# Altium PCB AMS_Slave.PcbDoc (part 1 of 2)
Units mm, origin at the board's own origin, x right, y up, seen from the top; angles counter-clockwise.
Board outline 75.06 x 58.17 mm, 2 copper layers (Top Layer, Bottom Layer); 190 components, 132 nets, 535 pads, 278 vias.
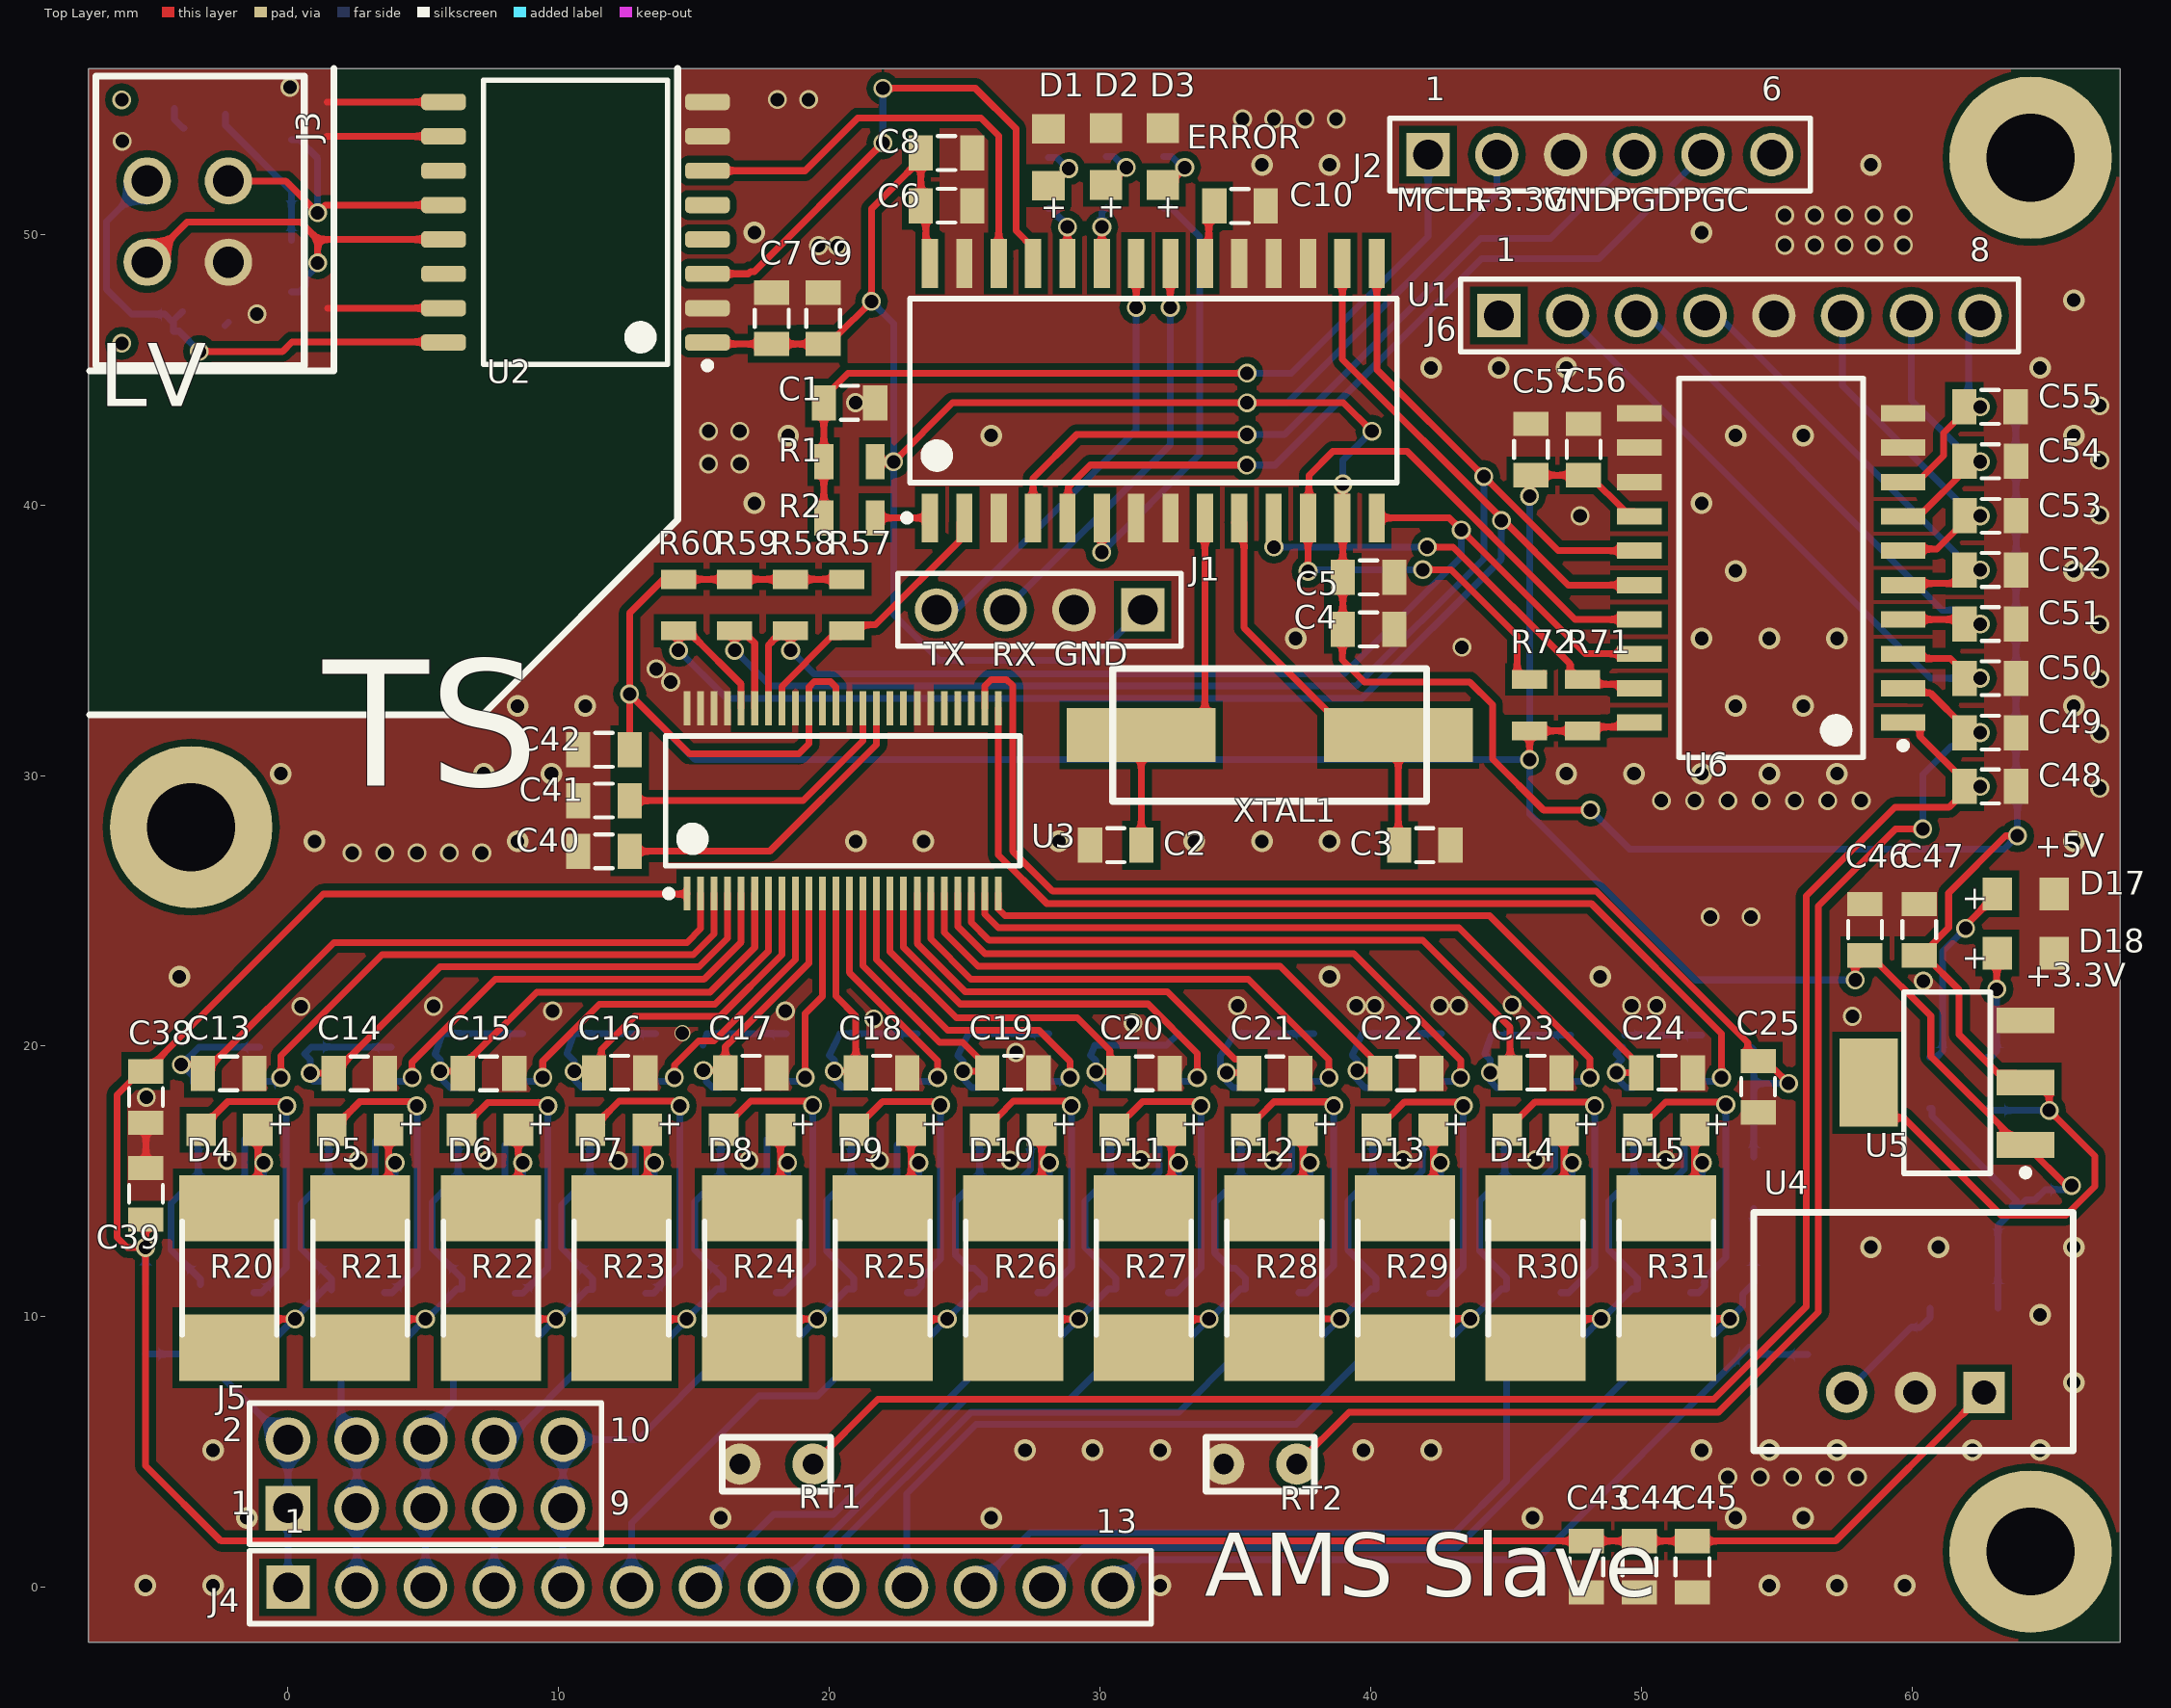
[diagram p0: Top Layer view]
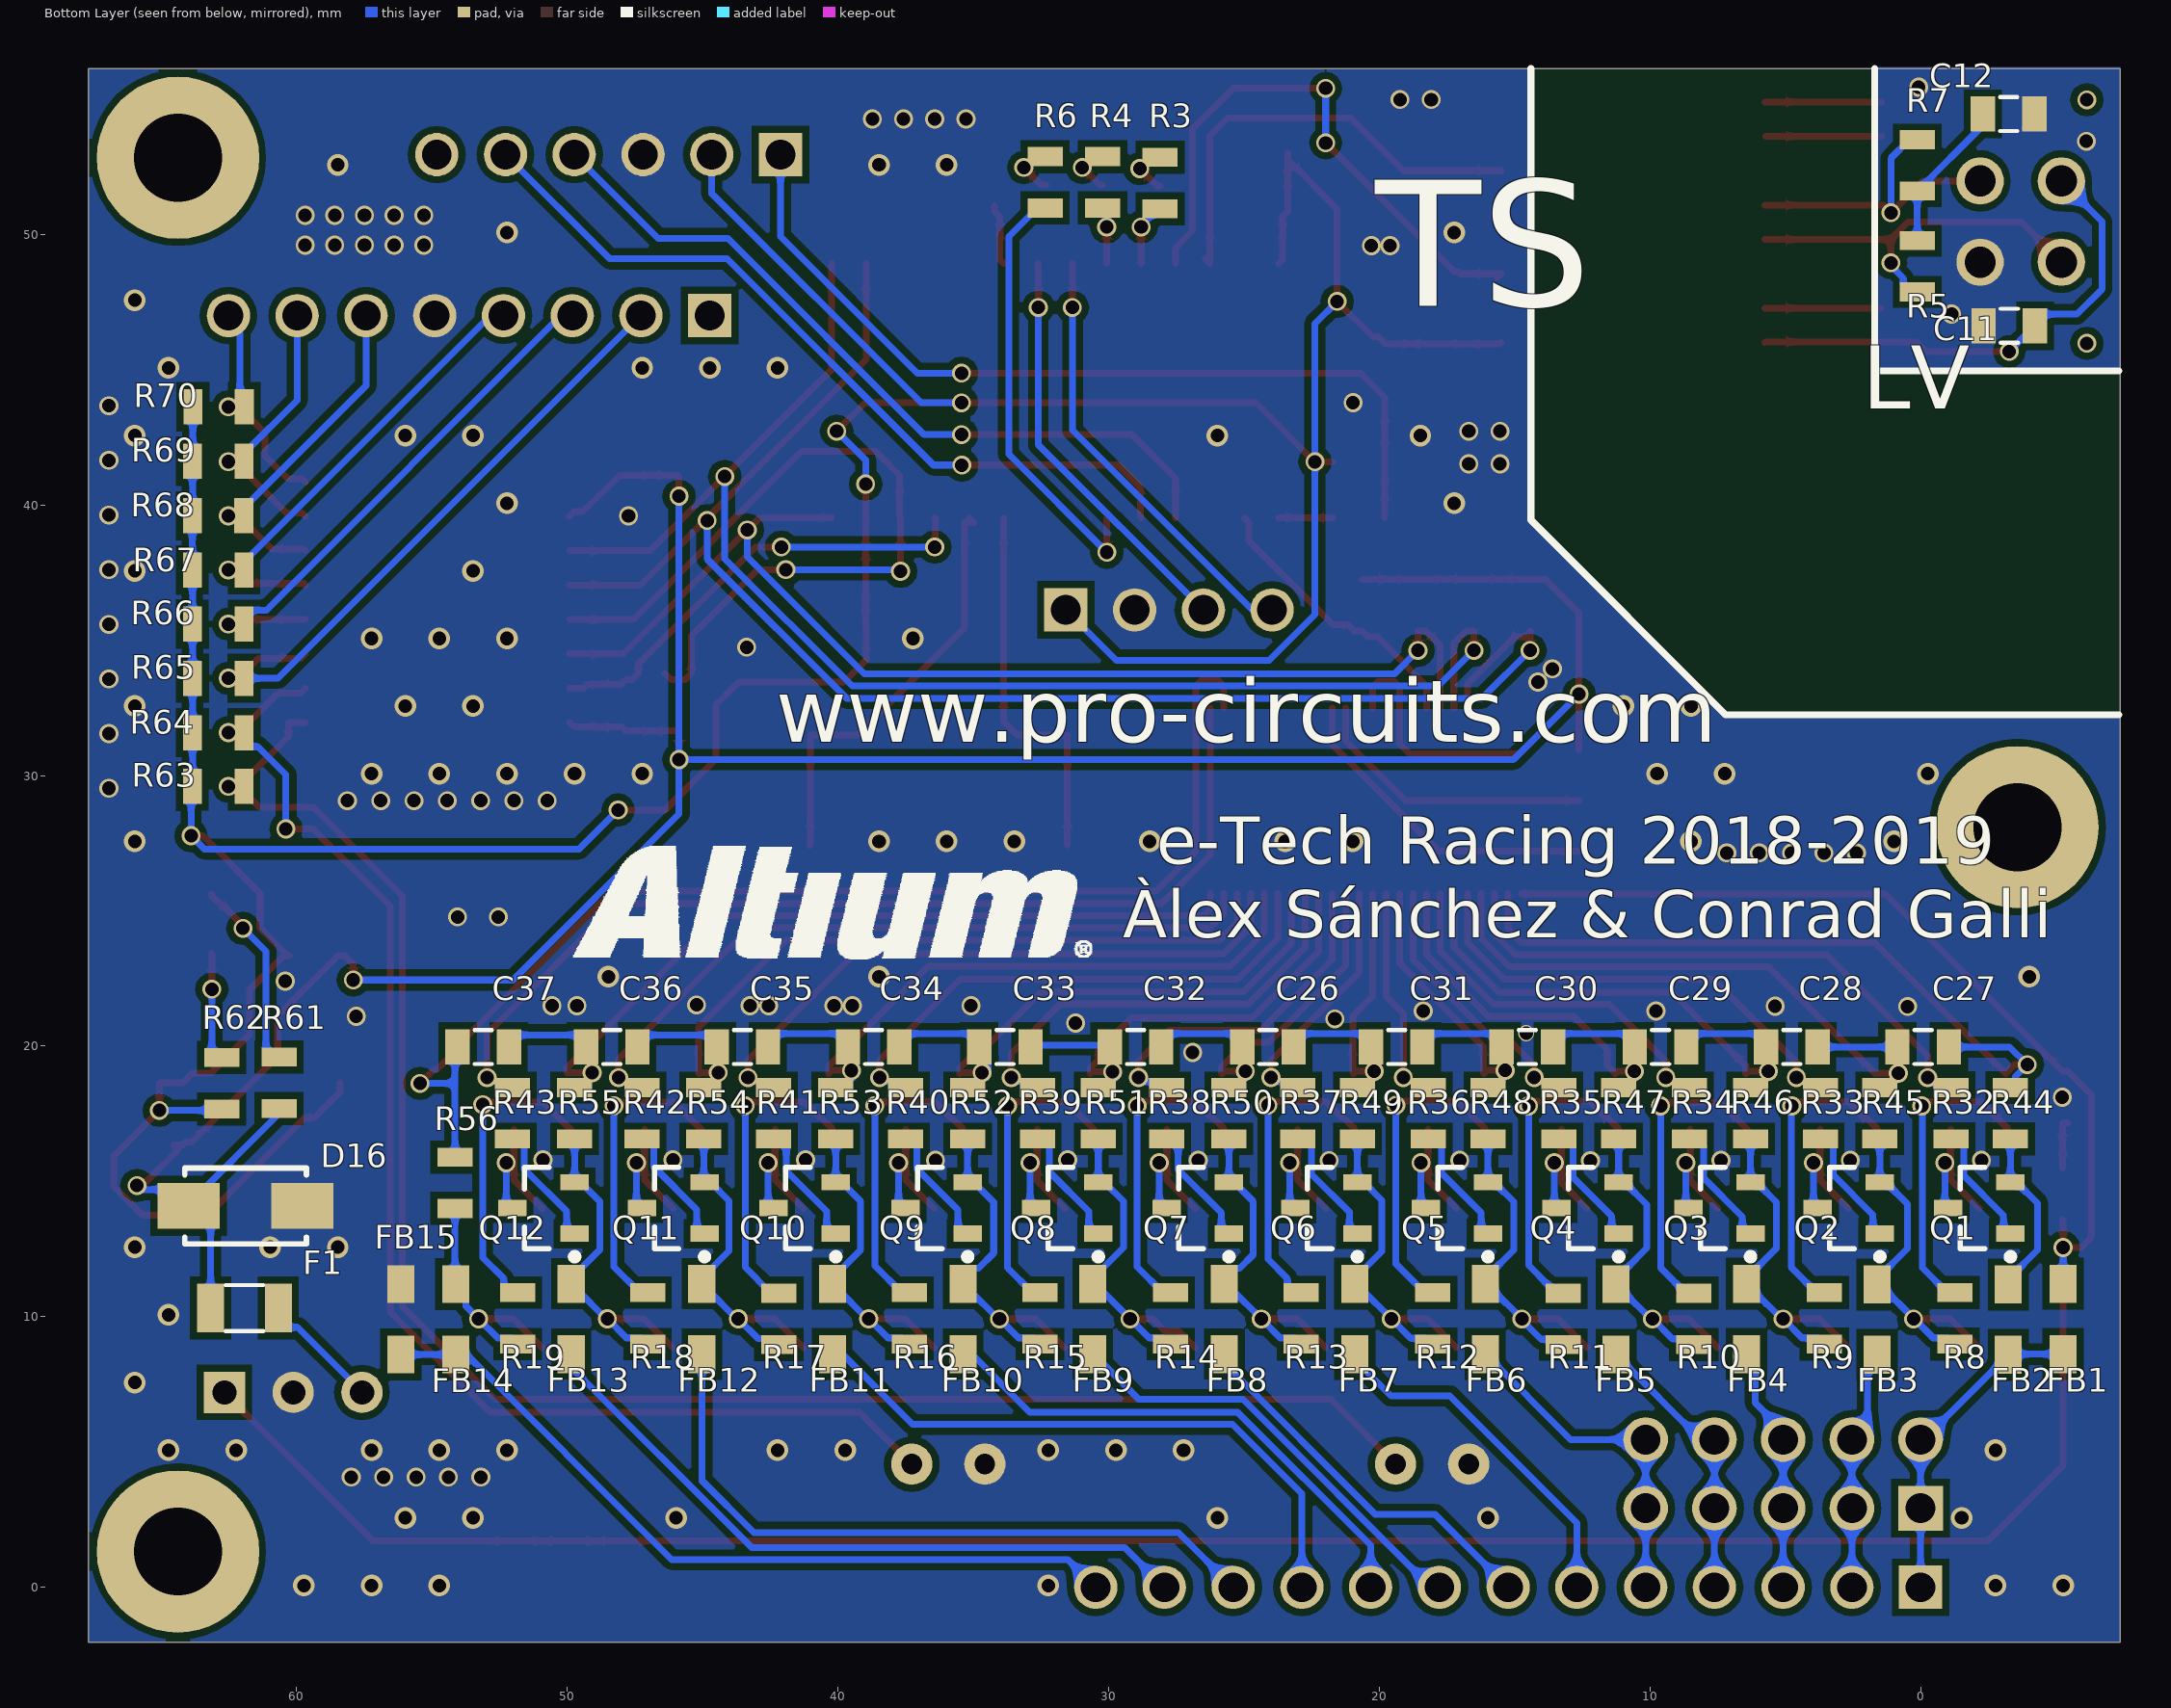
[diagram p1: Bottom Layer view, seen from below]
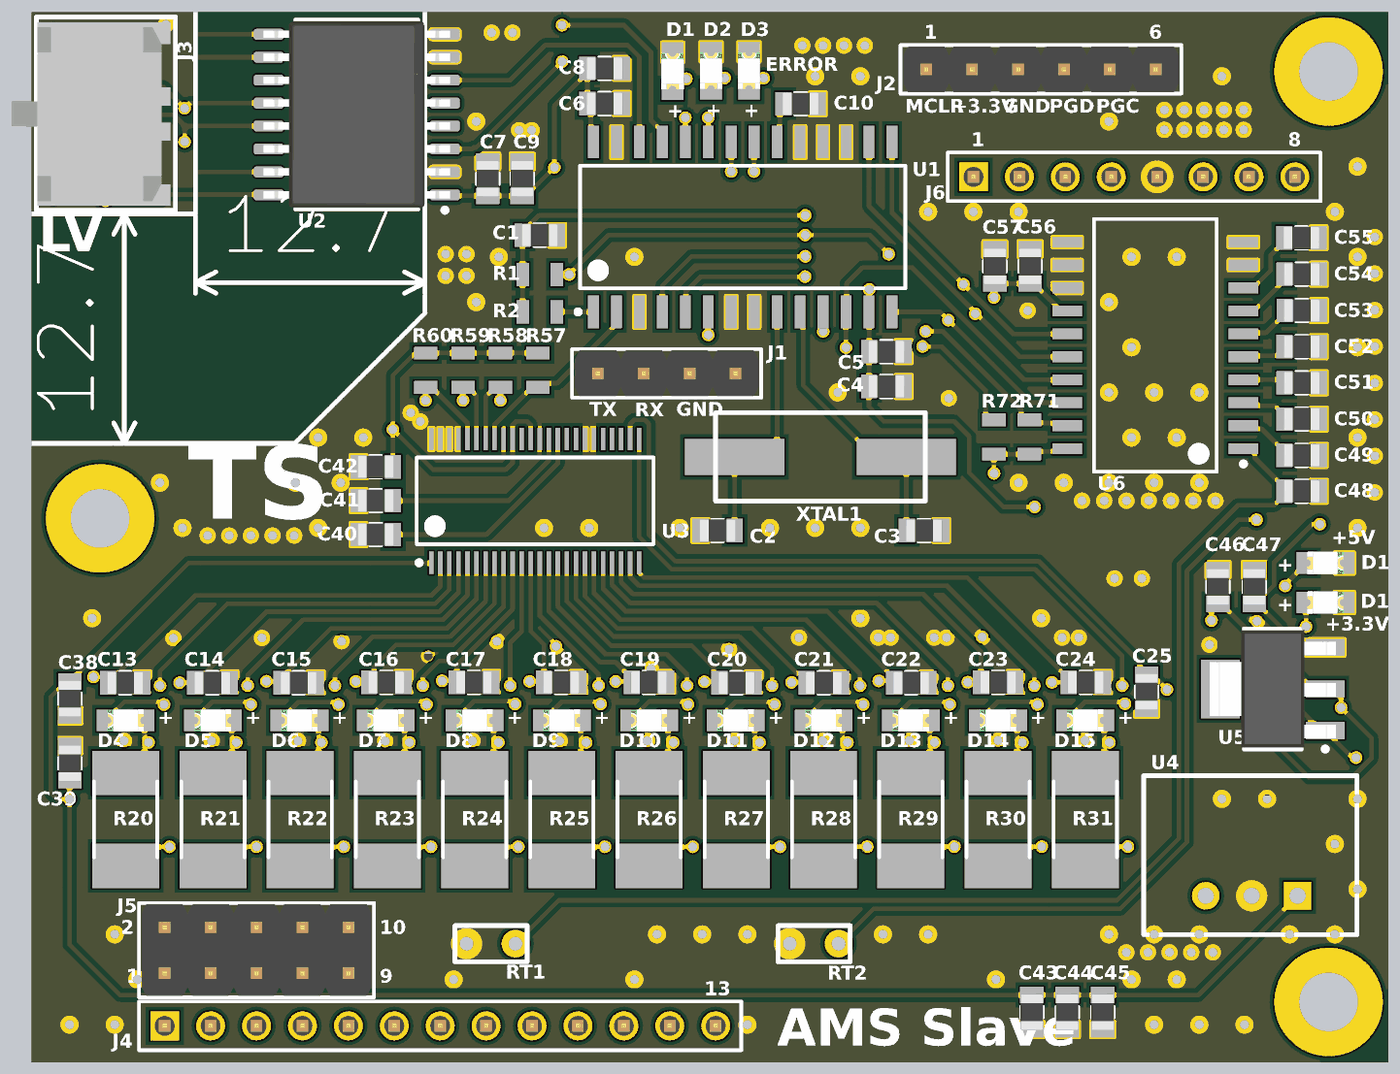
[diagram p3: 3D render of the assembled board from above, using the file's embedded part models]

## Layer stack, top to bottom
Top Solder: solder mask 0.0102, Solder Resist, Dk 3.5
Top Layer: signal copper 0.0356
Dielectric 1: dielectric 0.32, FR-4, Dk 4.8
Bottom Layer: signal copper 0.0356
Bottom Solder: solder mask 0.0102, Solder Resist, Dk 3.5

## Board outline
-7.366,-2.032 -7.366,56.134 67.691,56.134 67.691,-2.032

## Design rules (kind name [scope] priority, off if disabled: settings)
Clearance [All] p1: gap=0.254 ignorepadtopadclearanceinfootprint=TRUE except(0: Arc-Hole Track-Hole SMDPad-Hole THPad-Hole Via-Hole Fill-Hole Poly-Hole Region-Hole Text-Hole; 0.15: Arc-Via Track-Via SMDPad-Via; 0.2: Arc-Arc Arc-Track Arc-SMDPad Track-Track Track-SMDPad)
PolygonConnect [All] p1: connectstyle=Direct reliefconductorwidth=0.254 reliefentries=4 polygonreliefangle="90 Angle" airgapwidth=0.254
RoomDefinition AMS_MCU [InComponentClass('AMS_MCU')] p1: confinementstyle=ConfineIn formatcopy=TRUE lockcomponents=FALSE outline -9,26.35 69.35,26.35 69.35,57.425 -9,57.425
RoomDefinition AMS_balancing [InComponentClass('AMS_balancing')] p2: confinementstyle=ConfineIn formatcopy=TRUE lockcomponents=FALSE outline -7.95,-2.35 57.109,-2.35 57.109,41.574 -7.95,41.574
RoomDefinition AMS_temperature [InComponentClass('AMS_temperature')] p3: confinementstyle=ConfineIn formatcopy=TRUE lockcomponents=FALSE outline 15.593,3.05 68.6,3.05 68.6,51.775 15.593,51.775
RoomDefinition AMS_supply [InComponentClass('AMS_supply')] p4: confinementstyle=ConfineIn formatcopy=TRUE lockcomponents=FALSE outline 46.799,-2.837 68.15,-2.837 68.15,28.037 46.799,28.037
RoutingVias [All] p1: holewidth=0.2 width=0.5 viastyle="Through Hole" minholewidth=0.2 minwidth=0.5 maxholewidth=0.6 maxwidth=1.2
SolderMaskExpansion [All] p1: expansion=0.102
UnRoutedNet [All] p1: checkbadconnections=TRUE
Width [All] p1: maxlimit=0.254 minlimit=0.1 preferedwidth=0.25 minimp=50.000000 maximp=50.000000 favimp=50.000000
29 further rules are at their usual default settings.

## Classes and differential pairs
component class AMS_temperature: C48 C49 C50 C51 C52 C53 C54 C55 C56 C57 J6 R63 R64 R65 R66 R67 R68 R69 R70 R71 R72 RT1 RT2 U6
component class AMS_supply: C43 C44 C45 C46 C47 D16 D17 D18 F1 R61 R62 U4 U5
component class AMS_MCU: C1 C2 C3 C4 C5 C6 C7 C8 C9 C10 C11 C12 D1 D2 D3 J1 J2 J3 R1 R2 R3 R4 R5 R6 R7 U1 U2 XTAL1
component class AMS_balancing: C13 C14 C15 C16 C17 C18 C19 C20 C21 C22 C23 C24 C25 C26 C27 C28 C29 C30 C31 C32 C33 C34 C35 C36 C37 C38 C39 C40 C41 C42 D4 D5 D6 D7 D8 D9 D10 D11 D12 D13 D14 D15 FB1 FB2 FB3 FB4 FB5 FB6 FB7 FB8 FB9 FB10 FB11 FB12 FB13 FB14 FB15 J4 J5 Q1 Q2 Q3 Q4 Q5 Q6 Q7 Q8 Q9 Q10 Q11 Q12 R8 R9 R10 R11 R12 R13 R14 R15 R16 R17 R18 R19 R20 R21 R22 R23 R24 R25 R26 R27 R28 R29 R30 R31 R32 R33 R34 R35 R36 R37 R38 R39 R40 R41 R42 R43 R44 R45 R46 R47 R48 R49 R50 R51 R52 R53 R54 R55 R56 R57 R58 R59 R60 U3

## Components (designator, comment, footprint, x,y, rotation, side; value= is the part's Value field where it differs from the comment)
C1 "10nF" "0805_2x1.25x0.8mm_Reflow Soldering" 20.75,43.775 r180 top
C2 "15pF" "0805_2x1.25x0.6mm_Reflow Soldering" 30.584,27.425 r180 top
C3 "15pF" "0805_2x1.25x0.6mm_Reflow Soldering" 42.003,27.425 r0 top
C4 "100nF" "0805_2x1.25x0.8mm_Reflow Soldering" 39.925,35.4 r0 top
C5 "1nF" "0805_2x1.25x0.8mm_Reflow Soldering" 39.925,37.325 r0 top
C6 "1nF" "0805_2x1.25x0.8mm_Reflow Soldering" 24.333,51.059 r180 top
C7 "10uF" "0805_2x1.25x1.25mm_Reflow Soldering" 17.875,46.9 r270 top
C8 "100nF" "0805_2x1.25x0.8mm_Reflow Soldering" 24.333,53.009 r180 top
C9 "100nF" "0805_2x1.25x0.8mm_Reflow Soldering" 19.775,46.9 r270 top
C10 "10uF" "0805_2x1.25x1.25mm_Reflow Soldering" 35.175,51.05 r180 top
C11 "100nF" "0805_2x1.25x0.8mm_Reflow Soldering" -3.275,46.625 r180 bottom
C12 "10nF" "0805_2x1.25x0.8mm_Reflow Soldering" -3.25,54.45 r0 bottom
C13 "50V, 10nF" "0805_2x1.25x0.8mm_Reflow Soldering" -2.191,18.993 r180 top value=10nF
C14 "50V, 10nF" "0805_2x1.25x0.8mm_Reflow Soldering" 2.634,18.993 r180 top value=10nF
C15 "50V, 10nF" "0805_2x1.25x0.8mm_Reflow Soldering" 7.409,18.993 r180 top value=10nF
C16 "50V, 10nF" "0805_2x1.25x0.8mm_Reflow Soldering" 12.259,19.018 r180 top value=10nF
C17 "50V, 10nF" "0805_2x1.25x0.8mm_Reflow Soldering" 17.109,19.018 r180 top value=10nF
C18 "50V, 10nF" "0805_2x1.25x0.8mm_Reflow Soldering" 21.934,19.018 r180 top value=10nF
C19 "50V, 10nF" "0805_2x1.25x0.8mm_Reflow Soldering" 26.784,19.018 r180 top value=10nF
C20 "50V, 10nF" "0805_2x1.25x0.8mm_Reflow Soldering" 31.634,18.993 r180 top value=10nF
C21 "50V, 10nF" "0805_2x1.25x0.8mm_Reflow Soldering" 36.459,18.993 r180 top value=10nF
C22 "50V, 10nF" "0805_2x1.25x0.8mm_Reflow Soldering" 41.3,18.993 r180 top value=10nF
C23 "50V, 10nF" "0805_2x1.25x0.8mm_Reflow Soldering" 46.109,19.018 r180 top value=10nF
C24 "50V, 10nF" "0805_2x1.25x0.8mm_Reflow Soldering" 50.952,19.018 r180 top value=10nF
C25 "50V, 10nF" "0805_2x1.25x0.8mm_Reflow Soldering" 54.32,18.498 r90 top value=10nF
C26 "50V, 10nF" "0805_2x1.25x0.8mm_Reflow Soldering" 24.116,19.968 r180 bottom value=10nF
C27 "50V, 10nF" "0805_2x1.25x0.8mm_Reflow Soldering" -0.091,19.968 r180 bottom value=10nF
C28 "50V, 10nF" "0805_2x1.25x0.8mm_Reflow Soldering" 4.759,19.968 r180 bottom value=10nF
C29 "50V, 10nF" "0805_2x1.25x0.8mm_Reflow Soldering" 9.609,19.968 r180 bottom value=10nF
C30 "50V, 10nF" "0805_2x1.25x0.8mm_Reflow Soldering" 14.534,19.968 r180 bottom value=10nF
C31 "50V, 10nF" "0805_2x1.25x0.8mm_Reflow Soldering" 19.359,19.968 r180 bottom value=10nF
C32 "50V, 10nF" "0805_2x1.25x0.8mm_Reflow Soldering" 29.009,19.968 r180 bottom value=10nF
C33 "50V, 10nF" "0805_2x1.25x0.8mm_Reflow Soldering" 33.834,19.968 r180 bottom value=10nF
C34 "50V, 10nF" "0805_2x1.25x0.8mm_Reflow Soldering" 38.684,19.968 r180 bottom value=10nF
C35 "50V, 10nF" "0805_2x1.25x0.8mm_Reflow Soldering" 43.534,19.968 r180 bottom value=10nF
C36 "50V, 10nF" "0805_2x1.25x0.8mm_Reflow Soldering" 48.359,19.968 r180 bottom value=10nF
C37 "50V, 10nF" "0805_2x1.25x0.8mm_Reflow Soldering" 53.109,19.968 r180 bottom value=10nF
C38 "50V, 10nF" "0805_2x1.25x0.8mm_Reflow Soldering" -5.246,18.118 r270 top value=10nF
C39 "50V, 100nF" "0805_2x1.25x0.8mm_Reflow Soldering" -5.246,14.543 r90 top value=100nF
C40 "50V, 1uF" "0805_2x1.25x1.25mm_Reflow Soldering" 11.675,27.2 r0 top value=1uF
C41 "50V, 1uF" "0805_2x1.25x1.25mm_Reflow Soldering" 11.675,29.075 r0 top value=1uF
C42 "50V, 1uF" "0805_2x1.25x1.25mm_Reflow Soldering" 11.675,30.95 r0 top value=1uF
C43 "1uF" "0805_2x1.25x1.25mm_Reflow Soldering" 47.972,0.759 r90 top
C44 "1uF" "0805_2x1.25x1.25mm_Reflow Soldering" 49.932,0.759 r90 top
C45 "1uF" "0805_2x1.25x1.25mm_Reflow Soldering" 51.892,0.759 r90 top
C46 "100nF" "0805_2x1.25x0.8mm_Reflow Soldering" 58.27,24.302 r270 top
C47 "10nF" "0805_2x1.25x0.8mm_Reflow Soldering" 60.272,24.302 r270 top
C48 "10nF" "0805_2x1.25x0.8mm_Reflow Soldering" 62.9,29.6 r180 top
C49 "10nF" "0805_2x1.25x0.8mm_Reflow Soldering" 62.9,31.586 r180 top
C50 "10nF" "0805_2x1.25x0.8mm_Reflow Soldering" 62.9,33.596 r180 top
C51 "10nF" "0805_2x1.25x0.8mm_Reflow Soldering" 62.9,35.6 r180 top
C52 "10nF" "0805_2x1.25x0.8mm_Reflow Soldering" 62.9,37.6 r180 top
C53 "10nF" "0805_2x1.25x0.8mm_Reflow Soldering" 62.906,39.6 r180 top
C54 "10nF" "0805_2x1.25x0.8mm_Reflow Soldering" 62.9,41.614 r180 top
C55 "10nF" "0805_2x1.25x0.8mm_Reflow Soldering" 62.887,43.625 r180 top
C56 "10nF" "0805_2x1.25x0.8mm_Reflow Soldering" 47.872,42.05 r270 top
C57 "100nF" "0805_2x1.25x0.8mm_Reflow Soldering" 45.925,42.05 r270 top
D1 "Blue" WL-SMCW_0805 28.1,52.85 r270 top
D2 "Blue" WL-SMCW_0805 30.225,52.875 r270 top
D3 "Red" WL-SMCW_0805 32.325,52.875 r270 top
D4 "Yellow" WL-SMCW_0805 -2.159,16.912 r0 top
D5 "Yellow" WL-SMCW_0805 2.667,16.912 r0 top
D6 "Yellow" WL-SMCW_0805 7.459,16.912 r0 top
D7 "Yellow" WL-SMCW_0805 12.226,16.912 r0 top
D8 "Yellow" WL-SMCW_0805 17.145,16.912 r0 top
D9 "Yellow" WL-SMCW_0805 21.971,16.912 r0 top
D10 "Yellow" WL-SMCW_0805 26.797,16.912 r0 top
D11 "Yellow" WL-SMCW_0805 31.589,16.912 r0 top
D12 "Yellow" WL-SMCW_0805 36.449,16.912 r0 top
D13 "Yellow" WL-SMCW_0805 41.275,16.912 r0 top
D14 "Yellow" WL-SMCW_0805 46.101,16.912 r0 top
D15 "Yellow" WL-SMCW_0805 50.927,16.912 r0 top
D16 "400W, 5V" WE-TVSP_DO-214AC_Bidirectional 61.89,14.094 r0 bottom
D17 "Green" WL-SMCW_0805 64.206,25.627 r180 top
D18 "Bright Green" WL-SMCW_0805 64.206,23.435 r180 top
F1 "63 V, 0.5A" "437 Series" 61.931,10.321 r0 bottom
FB1 "560 Ohm" "0805_High Current" -5.266,9.918 r90 bottom
FB2 "560 Ohm" "0805_High Current" -3.241,9.893 r90 bottom
FB3 "560 Ohm" "0805_High Current" 1.609,9.893 r90 bottom
FB4 "560 Ohm" "0805_High Current" 6.434,9.918 r90 bottom
FB5 "560 Ohm" "0805_High Current" 11.259,9.903 r90 bottom
FB6 "560 Ohm" "0805_High Current" 16.084,9.918 r90 bottom
FB7 "560 Ohm" "0805_High Current" 20.909,9.918 r90 bottom
FB8 "560 Ohm" "0805_High Current" 25.734,9.918 r90 bottom
FB9 "560 Ohm" "0805_High Current" 30.584,9.918 r90 bottom
FB10 "560 Ohm" "0805_High Current" 35.384,9.918 r90 bottom
FB11 "560 Ohm" "0805_High Current" 40.209,9.918 r90 bottom
FB12 "560 Ohm" "0805_High Current" 45.034,9.918 r90 bottom
FB13 "560 Ohm" "0805_High Current" 49.859,9.918 r90 bottom
FB14 "560 Ohm" "0805_High Current" 54.125,9.903 r90 bottom
FB15 "560 Ohm" "0805_High Current" 56.157,9.903 r90 bottom
J1 "61300411121" 61300411121 27.77,36.125 r180 top
J2 "61300611121" 61300611121 48.475,52.95 r0 top
J3 "43045-0427" 43045-0427 -5.2,50.475 r90 top
J4 "61301311121" 61301311121-bottom 15.24,0 r0 top
J5 "61301021121" 61301021121 5.08,4.191 r0 top
J6 "61300811121" 61300811121-bottom 53.631,47 r0 top
Q1 "BSS308PE" INF-PG-SOT23_N -2.166,14.018 r0 bottom
Q2 "BSS308PE" INF-PG-SOT23_N 2.659,14.018 r0 bottom
Q3 "BSS308PE" INF-PG-SOT23_N 7.434,14.018 r0 bottom
Q4 "BSS308PE" INF-PG-SOT23_N 12.309,14.018 r0 bottom
Q5 "BSS308PE" INF-PG-SOT23_N 17.134,14.018 r0 bottom
Q6 "BSS308PE" INF-PG-SOT23_N 21.959,14.018 r0 bottom
Q7 "BSS308PE" INF-PG-SOT23_N 26.709,14.018 r0 bottom
Q8 "BSS308PE" INF-PG-SOT23_N 31.534,14.018 r0 bottom
Q9 "BSS308PE" INF-PG-SOT23_N 36.359,14.018 r0 bottom
Q10 "BSS308PE" INF-PG-SOT23_N 41.234,14.018 r0 bottom
Q11 "BSS308PE" INF-PG-SOT23_N 46.084,14.018 r0 bottom
Q12 "BSS308PE" INF-PG-SOT23_N 50.884,14.018 r0 bottom
R1 "10kΩ" CR0805 20.75,41.6 r0 top
R2 "100Ω" CR0805 20.75,39.525 r0 top
R3 "470Ω" CR0805 28.1,51.9 r270 bottom
R4 "470Ω" CR0805 30.225,51.925 r270 bottom
R5 "60.4Ω" CR0805 0.125,48.825 r270 bottom
R6 "470Ω" CR0805 32.35,51.925 r270 bottom
R7 "60.4Ω" CR0805 0.125,52.55 r90 bottom
R8 "470Ω" CR0805 -1.266,9.943 r90 bottom
R9 "470Ω" CR0805 3.559,9.943 r90 bottom
R10 "470Ω" CR0805 8.384,9.918 r90 bottom
R11 "470Ω" CR0805 13.209,9.918 r90 bottom
R12 "470Ω" CR0805 18.034,9.943 r90 bottom
R13 "470Ω" CR0805 22.884,9.943 r90 bottom
R14 "470Ω" CR0805 27.709,9.943 r90 bottom
R15 "470Ω" CR0805 32.534,9.943 r90 bottom
R16 "470Ω" CR0805 37.359,9.943 r90 bottom
R17 "470Ω" CR0805 42.184,9.918 r90 bottom
R18 "470Ω" CR0805 47.034,9.943 r90 bottom
R19 "470Ω" CR0805 51.834,9.943 r90 bottom
R20 "2W, 15Ω" 352115RFT -2.159,11.43 r90 top value=15O
R21 "2W, 15Ω" 352115RFT 2.667,11.43 r90 top value=15O
R22 "2W, 15Ω" 352115RFT 7.493,11.43 r90 top value=15O
R23 "2W, 15Ω" 352115RFT 12.319,11.43 r90 top value=15O
R24 "2W, 15Ω" 352115RFT 17.145,11.43 r90 top value=15O
R25 "2W, 15Ω" 352115RFT 21.971,11.43 r90 top value=15O
R26 "2W, 15Ω" 352115RFT 26.797,11.43 r90 top value=15O
R27 "2W, 15Ω" 352115RFT 31.623,11.43 r90 top value=15O
R28 "2W, 15Ω" 352115RFT 36.449,11.43 r90 top value=15O
R29 "2W, 15Ω" 352115RFT 41.275,11.43 r90 top value=15O
R30 "2W, 15Ω" 352115RFT 46.101,11.43 r90 top value=15O
R31 "2W, 15Ω" 352115RFT 50.927,11.43 r90 top value=15O
R32 "1kΩ" CR0805 -1.118,17.518 r90 bottom
R33 "1kΩ" CR0805 3.708,17.518 r90 bottom
R34 "1kΩ" CR0805 8.534,17.518 r90 bottom
R35 "1kΩ" CR0805 13.36,17.518 r90 bottom
R36 "1kΩ" CR0805 18.186,17.518 r90 bottom
R37 "1kΩ" CR0805 23.012,17.518 r90 bottom
R38 "1kΩ" CR0805 27.859,17.518 r90 bottom
R39 "1kΩ" CR0805 32.634,17.518 r90 bottom
R40 "1kΩ" CR0805 37.509,17.518 r90 bottom
R41 "1kΩ" CR0805 42.384,17.518 r90 bottom
R42 "1kΩ" CR0805 47.234,17.518 r90 bottom
R43 "1kΩ" CR0805 52.034,17.518 r90 bottom
R44 "100Ω" CR0805 -3.316,17.518 r90 bottom
R45 "100Ω" CR0805 1.509,17.518 r90 bottom
R46 "100Ω" CR0805 6.284,17.518 r90 bottom
R47 "100Ω" CR0805 11.159,17.518 r90 bottom
R48 "100Ω" CR0805 15.984,17.518 r90 bottom
R49 "100Ω" CR0805 20.809,17.518 r90 bottom
R50 "100Ω" CR0805 25.559,17.518 r90 bottom
R51 "100Ω" CR0805 30.384,17.518 r90 bottom
R52 "100Ω" CR0805 35.209,17.518 r90 bottom
R53 "100Ω" CR0805 40.084,17.518 r90 bottom
R54 "100Ω" CR0805 44.959,17.518 r90 bottom
R55 "100Ω" CR0805 49.734,17.518 r90 bottom
R56 "100Ω" CR0805 54.152,14.951 r90 bottom
R57 "4.7kΩ" CR0805 20.642,36.3 r90 top
R58 "4.7kΩ" CR0805 18.572,36.3 r90 top
R59 "4.7kΩ" CR0805 16.502,36.3 r90 top
R60 "4.7kΩ" CR0805 14.432,36.3 r90 top
R61 "470Ω" CR0805 60.653,18.647 r270 bottom
R62 "470Ω" CR0805 62.774,18.631 r270 bottom
R63 "10kΩ" CR0805 62.9,29.6 r0 bottom
R64 "10kΩ" CR0805 62.9,31.586 r0 bottom
R65 "10kΩ" CR0805 62.9,33.596 r0 bottom
R66 "10kΩ" CR0805 62.9,35.6 r0 bottom
R67 "10kΩ" CR0805 62.9,37.6 r0 bottom
R68 "10kΩ" CR0805 62.906,39.6 r0 bottom
R69 "10kΩ" CR0805 62.9,41.614 r0 bottom
R70 "10kΩ" CR0805 62.887,43.625 r0 bottom
R71 "4.7kΩ" CR0805 47.834,32.6 r270 top
R72 "4.7kΩ" CR0805 45.875,32.6 r270 top
RT1 "10kΩ" NXRT15XV103FA1B040 18.05,4.55 r0 top
RT2 "10kΩ" NXRT15XV103FA1B040 35.925,4.55 r0 top
U1 "PIC24HJ128GP502" PIC24HJ128GP502 31.975,44.225 r90 top
U2 "ISO1050DW" ISO1050DW 10.625,50.45 r180 top
U3 "LTC6811-2" LTC6811-2 20.497,29.063 r90 top
U4 "R-78HB5.0-0.5 / 173010542" R-78HB5.0-0.5 60.13,7.202 r180 top
U5 "1.5 - 13.8 Vin, 3.3 Vout" LM1117IMP3.3 61.3,18.65 r180 top
U6 "LTC1296" LTC1296 54.8,37.675 r180 top
XTAL1 "20MHz" 830028710 36.275,31.5 r180 top

## Footprints (in the part's own frame and the unit in brackets; to place one, negate y for a bottom-side part, rotate by r counter-clockwise, add the part's x,y. Pads: shape width x height; smd on the part's side, far side on the other; paste and mask are expansions set on the pad)
"437 Series" [mm] "Littlefuse, 437A Series"
  rect 1x1.8 smd: 1(-1.25,0) 2(1.25,0)
  silkscreen extent -0.7,-0.85 0.7,0.85, body extent -1.6,-0.71 1.6,0.71, height 1
"0805_2x1.25x0.6mm_Reflow Soldering" [mm] "Ceramic Capacitors, 0805, body 2x1.25mm"
  rect 0.9x1.3 smd: 1(-0.95,0) 2(0.95,0)
  silkscreen extent -0.32,-0.62 0.32,0.63, body extent -1,-0.62 1,0.63, height 0.63
"0805_2x1.25x0.8mm_Reflow Soldering" [mm] "Ceramic Capacitors, 0805, body 2x1.25mm"
  rect 0.9x1.3 smd: 1(-0.95,0) 2(0.95,0)
  silkscreen extent -0.32,-0.62 0.32,0.63, body extent -1,-0.62 1,0.63, height 0.83
"0805_2x1.25x1.25mm_Reflow Soldering" [mm] "Ceramic Capacitors, 0805, body 2x1.25mm"
  rect 0.9x1.3 smd: 1(-0.95,0) 2(0.95,0)
  silkscreen extent -0.32,-0.62 0.32,0.63, body extent -1,-0.62 1,0.63, height 1.28
"0805_High Current" [mm] "SMD EMI Suppression Ferrite Bead, 2-Leads, Body 2.00x1.20mm, IPC Medium Density"
  rect 1.4x1 smd: 1(-1.3,0) 2(1.3,0)
  body extent -1,-0.6 1,0.6, height 0.93
43045-0427 [mm] "Micro-Fit 3.0 Vertical Header, 3.00mm Pitch, Dual Row, 4 Circuits, Black"
  round 1.75 hole 1.15: 1(1.5,0) 2(-1.5,0) 3(1.5,-3) 4(-1.5,-3)
  silkscreen extent -5.33,-5.8 5.38,1.9, body extent -5.07,-5.52 5.08,3.25, height 9.95
352115RFT [mm] "Chip Resistor, 2-Leads, Body 6,35x3,20mm, IPC Medium Density"
  rect 2.45x3.7 smd: 1(-2.575,0) 2(2.575,0)
  silkscreen extent -2.1,-1.75 2.1,1.75, body extent -3.23,-1.68 3.22,1.67, height 0.65
830028710 [mm]
  rect 5.5x2 smd: 1(-4.75,0) 2(4.75,0)
  silkscreen extent -5.8,-2.45 5.8,2.45, body extent -5.8,-2.45 5.8,2.45, height 4.3
61300411121 [mm] "Pin Header, pitch 2.54 mm, THT, Vertical, single row, 4p"
  rect 1.6x1.6 hole 1.1: 1(-3.81,0)
  round 1.6 hole 1.1: 2(-1.27,0) 3(1.27,0) 4(3.81,0)
  silkscreen extent -5.23,-1.35 5.23,1.35, body extent -5.08,-1.27 5.08,1.27, height 8.57
61300611121 [mm] "Pin Header, pitch 2.54 mm, THT, Vertical, single row, 6p"
  rect 1.6x1.6 hole 1.1: 1(-6.35,0)
  round 1.6 hole 1.1: 2(-3.81,0) 3(-1.27,0) 4(1.27,0) 5(3.81,0) 6(6.35,0)
  silkscreen extent -7.77,-1.35 7.77,1.35, body extent -7.62,-1.27 7.62,1.27, height 8.57
61300811121-bottom [mm] "Pin Header, pitch 2.54 mm, THT, Vertical, single row, 8p"
  rect 1.6x1.6 hole 1.1: 1(-8.89,0)
  round 1.6 hole 1.1: 2(-6.35,0) 3(-3.81,0) 4(-1.27,0) 5(1.27,0) 6(3.81,0) 7(6.35,0) 8(8.89,0)
  silkscreen extent -10.31,-1.35 10.31,1.35, body extent -10.16,-1.27 10.16,1.27, height 8.57
61301021121 [mm] "Pin Header, pitch 2.54 mm, THT, Vertical, dual row, 10p"
  rect 1.65x1.65 hole 1.1: 1(-5.08,-1.27)
  round 1.65 hole 1.1: 2(-5.08,1.27) 3(-2.54,-1.27) 4(-2.54,1.27) 5(0,-1.27) 6(0,1.27) 7(2.54,-1.27) 8(2.54,1.27) 9(5.08,-1.27) 10(5.08,1.27)
  silkscreen extent -6.5,-2.62 6.5,2.62, body extent -6.35,-2.54 6.35,2.54, height 8.59
61301311121-bottom [mm] "Pin Header, pitch 2.54 mm, THT, Vertical, single row, 13p"
  rect 1.6x1.6 hole 1.1: 1(-15.24,0)
  round 1.6 hole 1.1: 2(-12.7,0) 3(-10.16,0) 4(-7.62,0) 5(-5.08,0) 6(-2.54,0) 7(0,0) 8(2.54,0) 9(5.08,0) 10(7.62,0) 11(10.16,0) 12(12.7,0) 13(15.24,0)
  silkscreen extent -16.66,-1.35 16.66,1.35, body extent -16.51,-1.27 16.51,1.27, height 8.57
CR0805 [mm] "Chip Resistor, 2-Leads, Body 2,00x1,25mm, IPC Medium Density"
  rect 0.7x1.3 smd: 1(-0.95,0) 2(0.95,0)
  body extent -1.08,-0.7 1.07,0.7, height 0.6
INF-PG-SOT23_N [mm] "SOT23, 3-Leads, Body 2.9x1.3mm, Pitch 0.95mm, IPC Medium Density"
  rect 1.05x0.6 smd: 1(-1.15,0.95) 2(-1.15,-0.95) 3(1.15,0)
  silkscreen extent -1.27,-1.5 0.7,1.92, body extent -0.7,-1.5 0.7,1.5, height 1.1
ISO1050DW [mm] "SOIC, 16-Leads, Body 10,30x7,50mm, Pitch 1,27mm, IPC Medium Density"
  rrect50% 1.65x0.6 smd: 1(-4.875,4.445) 2(-4.875,3.175) 3(-4.875,1.905) 4(-4.875,0.635) 5(-4.875,-0.635) 6(-4.875,-1.905) 7(-4.875,-3.175) 8(-4.875,-4.445) 9(4.875,-4.445) 10(4.875,-3.175) 11(4.875,-1.905) 12(4.875,-0.635) 13(4.875,0.635) 14(4.875,1.905) 15(4.875,3.175) 16(4.875,4.445)
  silkscreen extent -5,-5.25 3.4,5.42, body extent -5.17,-5.15 5.17,5.15, height 2.59
LM1117IMP3.3 [mm] "SOT223, 4-Leads, Body 6,50x7,00mm (avg), Pitch 2,30mm, IPC Medium Density"
  rect 2.15x0.95 smd: 1(-2.9,2.3) 2(-2.9,-2.3) 3(-2.9,0)
  rect 2.15x3.25 smd: 3(2.9,0)
  silkscreen extent -3.03,-3.35 1.6,3.45, body extent -3.5,-3.25 3.5,3.25, height 1.68
LTC1296 [mm] "SOL, 20-Leads, Body 13,30x7,49mm, Pitch 1,27mm, IPC Medium Density"
  rect 1.65x0.6 smd: 1(-4.875,5.715) 2(-4.875,4.445) 3(-4.875,3.175) 4(-4.875,1.905) 5(-4.875,0.635) 6(-4.875,-0.635) 7(-4.875,-1.905) 8(-4.875,-3.175) 9(-4.875,-4.445) 10(-4.875,-5.715) 11(4.875,-5.715) 12(4.875,-4.445) 13(4.875,-3.175) 14(4.875,-1.905) 15(4.875,-0.635) 16(4.875,0.635) 17(4.875,1.905) 18(4.875,3.175) 19(4.875,4.445) 20(4.875,5.715)
  silkscreen extent -5,-7 3.4,7, body extent -3.8,-7 3.8,7, height 2.95
LTC6811-2 [mm] "SSOP, 48-Leads, Body 12,80x5,30mm, Pitch 0,50mm, IPC Medium Density"
  rect 1.25x0.25 smd: 1(-3.425,5.75) 2(-3.425,5.25) 3(-3.425,4.75) 4(-3.425,4.25) 5(-3.425,3.75) 6(-3.425,3.25) 7(-3.425,2.75) 8(-3.425,2.25) 9(-3.425,1.75) 10(-3.425,1.25) 11(-3.425,0.75) 12(-3.425,0.25) 13(-3.425,-0.25) 14(-3.425,-0.75) 15(-3.425,-1.25) 16(-3.425,-1.75) 17(-3.425,-2.25) 18(-3.425,-2.75) 19(-3.425,-3.25) 20(-3.425,-3.75) 21(-3.425,-4.25) 22(-3.425,-4.75) 23(-3.425,-5.25) 24(-3.425,-5.75) 25(3.425,-5.75) 26(3.425,-5.25) 27(3.425,-4.75) 28(3.425,-4.25) 29(3.425,-3.75) 30(3.425,-3.25) 31(3.425,-2.75) 32(3.425,-2.25) 33(3.425,-1.75) 34(3.425,-1.25) 35(3.425,-0.75) 36(3.425,-0.25) 37(3.425,0.25) 38(3.425,0.75) 39(3.425,1.25) 40(3.425,1.75) 41(3.425,2.25) 42(3.425,2.75) 43(3.425,3.25) 44(3.425,3.75) 45(3.425,4.25) 46(3.425,4.75) 47(3.425,5.25) 48(3.425,5.75)
  silkscreen extent -3.55,-6.55 2.4,6.55, body extent -2.8,-6.55 2.8,6.55, height 2
NXRT15XV103FA1B040 [mil]
  round 60 hole 30: 1(-53.15,0) 2(53.15,0)
  silkscreen extent -79,-39 79,39, body extent -79,-39 79,39, height 295
PIC24HJ128GP502 [mm] "SOP, 28-Leads, Body 17,90x7,50mm, Pitch 1,27mm, IPC Medium Density"
  rect 1.8x0.6 smd: 1(-4.7,8.255) 2(-4.7,6.985) 3(-4.7,5.715) 4(-4.7,4.445) 5(-4.7,3.175) 6(-4.7,1.905) 7(-4.7,0.635) 8(-4.7,-0.635) 9(-4.7,-1.905) 10(-4.7,-3.175) 11(-4.7,-4.445) 12(-4.7,-5.715) 13(-4.7,-6.985) 14(-4.7,-8.255) 15(4.7,-8.255) 16(4.7,-6.985) 17(4.7,-5.715) 18(4.7,-4.445) 19(4.7,-3.175) 20(4.7,-1.905) 21(4.7,-0.635) 22(4.7,0.635) 23(4.7,1.905) 24(4.7,3.175) 25(4.7,4.445) 26(4.7,5.715) 27(4.7,6.985) 28(4.7,8.255)
  silkscreen extent -4.82,-9 3.4,9.23, body extent -3.8,-9 3.8,9, height 2.65
R-78HB5.0-0.5 [mil] "3 leads"
  rect 60x60 hole 35.43: 1(-100,0)
  round 60 hole 35.43: 2(0,0) 3(100,0)
  silkscreen extent -229,-262 235,85, body extent -223,-256 229,79, height 689
WE-TVSP_DO-214AC_Bidirectional [mm] "Power TVS Diode, 2-Leads. body 4.5x2.8mm"
  rect 2.3x1.7 smd: 1(-2.1,0) 2(2.1,0)
  silkscreen extent -2.25,-1.4 2.25,1.4, body extent -2.56,-1.33 2.56,1.34, height 2.24
WL-SMCW_0805 [mm] "SMD Mono-color Chip LED, body 2.0x1.25mm"
  rect 1.1x1.2 smd: 1(-1.05,0) 2(1.05,0)
  body extent -1,-0.63 1,0.62, height 0.7

## Part data
C1 C12 C13 C14 C15 C16 C17 C18 C19 C20 C21 C22 C23 C24 C25 C26 C27 C28 C29 C30 C31 C32 C33 C34 C35 C36 C37 C38 C47 C48 C49 C50 C51 C52 C53 C54 C55 C56: library part 885012207092, "WCAP-CSGP Ceramic Capacitors, 0805, X7R, 50V, 10nF", Operating Temperature="-55 °C to +125 °C", Rated Voltage="50V DC", Ceramic Type=X7R, ComponentLink1Description=Manufacturer, ComponentLink1URL=http://www.we-online.de, ComponentLink2Description=Datasheet, ComponentLink2URL=http://katalog.we-online.de/pbs/datasheet/885012207092.pdf, Part Number=885012207092, Publisher="Wurth Elektronik", Size=0805
C2 C3: library part 885012007052, "WCAP-CSGP Ceramic Capacitors, 0805, NP0, 50V, 15pF", Operating Temperature="-55 °C to +125 °C", Rated Voltage="50V DC", Ceramic Type=NP0, ComponentLink1Description=Manufacturer, ComponentLink1URL=http://www.we-online.de, ComponentLink2Description=Datasheet, ComponentLink2URL=http://katalog.we-online.de/pbs/datasheet/885012007052.pdf, Part Number=885012007052, Published Date="Oct. 2017", Publisher="Wurth Elektronik", Size=0805
C4 C8 C9 C11 C39 C46 C57: library part 885012207098, "WCAP-CSGP Ceramic Capacitors, 0805, X7R, 50V, 100nF", Operating Temperature="-55 °C to +125 °C", Rated Voltage="50V DC", Ceramic Type=X7R, ComponentLink1Description=Manufacturer, ComponentLink1URL=http://www.we-online.de, ComponentLink2Description=Datasheet, ComponentLink2URL=http://katalog.we-online.de/pbs/datasheet/885012207098.pdf, Part Number=885012207098, Publisher="Wurth Elektronik", Size=0805
C5 C6: library part 885012007063, "WCAP-CSGP Ceramic Capacitors, 0805, NP0, 50V, 1nF", Operating Temperature="-55 °C to +125 °C", Rated Voltage="50V DC", Ceramic Type=NP0, ComponentLink1Description=Manufacturer, ComponentLink1URL=http://www.we-online.de, ComponentLink2Description=Datasheet, ComponentLink2URL=http://katalog.we-online.de/pbs/datasheet/885012007063.pdf, Part Number=885012007063, Published Date="Oct. 2017", Publisher="Wurth Elektronik", Size=0805
C7 C10: library part 885012107014, "WCAP-CSGP Ceramic Capacitors, 0805, X5R, 16V, 10uF", Operating Temperature="-55 °C to +125 °C", Rated Voltage="16V DC", Ceramic Type=X5R, ComponentLink1Description=Manufacturer, ComponentLink1URL=http://www.we-online.de, ComponentLink2Description=Datasheet, ComponentLink2URL=http://katalog.we-online.de/pbs/datasheet/885012107014.pdf, Part Number=885012107014, Published Date="Oct. 2017", Publisher="Wurth Elektronik", Size=0805
C40 C41 C42 C43 C44 C45: library part 885012207103, "WCAP-CSGP Ceramic Capacitors, 0805, X7R, 50V, 1uF", Operating Temperature="-55 °C to +125 °C", Rated Voltage="50V DC", Ceramic Type=X7R, ComponentLink1Description=Manufacturer, ComponentLink1URL=http://www.we-online.de, ComponentLink2Description=Datasheet, ComponentLink2URL=http://katalog.we-online.de/pbs/datasheet/885012207103.pdf, Part Number=885012207103, Publisher="Wurth Elektronik", Size=0805
D1 D2: library part 150080BS75000, "SMT Mono-color Chip LED Waterclear WL-SMCW, size 0805, Blue, 3.2 V, 140 deg, 145 mcd", Forward Voltage="3.2 V", Operating Temperature="-40 to 85 degC", Chip Technology=InGaN, ComponentLink1Description=Manufacturer, ComponentLink1URL=http://www.we-online.de, ComponentLink2Description=Datasheet, ComponentLink2URL=https://katalog.we-online.de/led/datasheet/150080BS75000.pdf, Dominant Wavelength="470 nm", Emitting Color=Blue, Luminous Intensity="145 mcd", Mounting Technology=SMT, Packaging="Tape and Reel", Part Number=150080BS75000, Peak Wavelength="465 nm", Published Date="November 2018", Publisher="Wurth Elektronik", Size=0805, Viewing Angle="140 deg"
D3: library part 150080RS75000, "SMT Mono-color Chip LED Waterclear WL-SMCW, size 0805, Red, 2 V, 140 deg, 150 mcd", Forward Voltage="2 V", Operating Temperature="-40 to 85 degC", Chip Technology=AlInGaP, ComponentLink1Description=Manufacturer, ComponentLink1URL=http://www.we-online.de, ComponentLink2Description=Datasheet, ComponentLink2URL=https://katalog.we-online.de/led/datasheet/150080RS75000.pdf, Dominant Wavelength="625 nm", Emitting Color=Red, Luminous Intensity="150 mcd", Mounting Technology=SMT, Packaging="Tape and Reel", Part Number=150080RS75000, Peak Wavelength="630 nm", Published Date="November 2018", Publisher="Wurth Elektronik", Size=0805, Viewing Angle="140 deg"
D4 D5 D6 D7 D8 D9 D10 D11 D12 D13 D14 D15: library part 150080YS75000, "SMT Mono-color Chip LED Waterclear WL-SMCW, size 0805, Yellow, 2 V, 140 deg, 120 mcd", Forward Voltage="2 V", Operating Temperature="-40 to 85 degC", Chip Technology=AlInGaP, ComponentLink1Description=Manufacturer, ComponentLink1URL=http://www.we-online.de, ComponentLink2Description=Datasheet, ComponentLink2URL=https://katalog.we-online.de/led/datasheet/150080YS75000.pdf, Dominant Wavelength="590 nm", Emitting Color=Yellow, Luminous Intensity="120 mcd", Mounting Technology=SMT, Packaging="Tape and Reel", Part Number=150080YS75000, Peak Wavelength="595 nm", Publisher="Wurth Elektronik", Size=0805, Viewing Angle="140 deg"
D16: library part 824501500, "WE-TVSP Power TVS Diode, size DO-214AC, Bidirectional, 400 W, 5 VDC", Manufacturer="Wurth Elektronik", Operating Temperature="-65ºC to 150 ºC", Peak Pulse Current="43.5 A", Power Dissipation="400 W", Reverse Breakdown Voltage="6.7 V", Reverse Stand-Off Voltage="5 V", Surge Clamping Voltage="9.2 V", ComponentLink1Description=Manufacturer, ComponentLink1URL=http://www.we-online.de, ComponentLink2Description=Datasheet, ComponentLink2URL=https://katalog.we-online.de/pbs/datasheet/824501500.pdf, Mounting Technology=SMT, Packaging="Tape and Reel", Part Number=824501500, Polarity=Bidirectional, Size=DO-214AC
D17: library part 150080GS75000, "SMT Mono-color Chip LED Waterclear WL-SMCW, size 0805, Green, 3.2 V, 140 deg, 450 mcd", Forward Voltage="3.2 V", Operating Temperature="-40 to 85 degC", Chip Technology=InGaN, ComponentLink1Description=Manufacturer, ComponentLink1URL=http://www.we-online.de, ComponentLink2Description=Datasheet, ComponentLink2URL=https://katalog.we-online.de/led/datasheet/150080GS75000.pdf, Dominant Wavelength="525 nm", Emitting Color=Green, Luminous Intensity="450 mcd", Mounting Technology=SMT, Packaging="Tape and Reel", Part Number=150080GS75000, Peak Wavelength="515 nm", Published Date="November 2018", Publisher="Wurth Elektronik", Size=0805, Viewing Angle="140 deg"
D18: library part 150080VS75000, "SMT Mono-color Chip LED Waterclear WL-SMCW, size 0805, Bright Green, 2 V, 140 deg, 40 mcd", Forward Voltage="2 V", Operating Temperature="-40 to 85 degC", Chip Technology=AlInGaP, ComponentLink1Description=Manufacturer, ComponentLink1URL=http://www.we-online.de, ComponentLink2Description=Datasheet, ComponentLink2URL=https://katalog.we-online.de/led/datasheet/150080VS75000.pdf, Dominant Wavelength="570 nm", Emitting Color="Bright Green", Luminous Intensity="40 mcd", Mounting Technology=SMT, Packaging="Tape and Reel", Part Number=150080VS75000, Peak Wavelength="572 nm", Published Date="November 2018", Publisher="Wurth Elektronik", Size=0805, Viewing Angle="140 deg"
F1: library part 0437.500A, "437A Series Fuse", Manufacturer=Littlefuse, ComponentLink1Description=Datasheet, ComponentLink1URL=https://www.littelfuse.com/~/media/electronics/datasheets/fuses/littelfuse_fuse_437a_datasheet.pdf.pdf
FB1 FB2 FB3 FB4 FB5 FB6 FB7 FB8 FB9 FB10 FB11 FB12 FB13 FB14 FB15: library part 782853561, "WE-CBA SMD EMI Suppression Ferrite Bead, 0805, High Current, 1.5 A, 560 Ohm", DC Resistance max.="0.1 Ohm", Operating Temperature="-55 to 125 degC", Rated Current="1.5 A", ComponentLink1Description=Manufacturer, ComponentLink1URL=http://www.we-online.de, ComponentLink2Description=Datasheet, ComponentLink2URL=http://katalog.we-online.de/pbs/datasheet/782853561.pdf, Impedance="560 Ohm", Part Number=782853561, Published Date="Oct. 2017", Publisher="Wurth Elektronik", Size=0805, Type="High Current"
J1: "THT Vertical Pin Header WR-PHD, Pitch 2.54 mm, Single Row, 4 pins", Contact Resistance="20 mOhm", Operating Temperature="-40 to 105 degC", Rated Current="3 A", Withstanding Voltage="500 VAC", Working Voltage="250 VAC", ComponentLink1Description=Manufacturer, ComponentLink1URL=http://www.we-online.de, ComponentLink2Description=Datasheet, ComponentLink2URL=https://katalog.we-online.de/em/datasheet/6130xx11121.pdf, Gender=Male, Mounting Technology=THT, Orientation=Vertical, Packaging=Bag, Part Number=61300411121, Pin Number=4, Pitch="2.54 mm", Published Date="August 2018", Publisher="Wurth Elektronik", Row Number=Single
J2: "THT Vertical Pin Header WR-PHD, Pitch 2.54 mm, Single Row, 6 pins", Contact Resistance="20 mOhm", Operating Temperature="-40 to 105 degC", Rated Current="3 A", Withstanding Voltage="500 VAC", Working Voltage="250 VAC", ComponentLink1Description=Manufacturer, ComponentLink1URL=http://www.we-online.de, ComponentLink2Description=Datasheet, ComponentLink2URL=https://katalog.we-online.de/em/datasheet/6130xx11121.pdf, Gender=Male, Mounting Technology=THT, Orientation=Vertical, Packaging=Bag, Part Number=61300611121, Pin Number=6, Pitch="2.54 mm", Published Date="August 2018", Publisher="Wurth Elektronik", Row Number=Single
J3: "Micro-Fit 3.0 Vertical Header, 3.00mm Pitch, Dual Row, 4 Circuits, Black", Manufacturer=Molex, Operating Temperature="-40° to +105°C", Rated Current=8.5A, Rated Voltage="600V DC", Circuits=4, ComponentLink1Description=Datasheet, ComponentLink1URL=https://www.molex.com/webdocs/datasheets/pdf/en-us/0430450427_PCB_HEADERS.pdf, Number of Rows=2
J4: "THT Vertical Pin Header WR-PHD, Pitch 2.54 mm, Single Row, 13 pins", Contact Resistance="20 mOhm", Operating Temperature="-40 to 105 degC", Rated Current="3 A", Withstanding Voltage="500 VAC", Working Voltage="250 VAC", ComponentLink1Description=Manufacturer, ComponentLink1URL=http://www.we-online.de, ComponentLink2Description=Datasheet, ComponentLink2URL=https://katalog.we-online.de/em/datasheet/6130xx11121.pdf, Gender=Male, Mounting Technology=THT, Orientation=Vertical, Packaging=Bag, Part Number=61301311121, Pin Number=13, Pitch="2.54 mm", Published Date="August 2018", Publisher="Wurth Elektronik", Row Number=Single
J5: "THT Vertical Pin Header WR-PHD, Pitch 2.54 mm, Dual Row, 10 pins", Contact Resistance="20 mOhm", Operating Temperature="-40 to 105 degC", Rated Current="3 A", Withstanding Voltage="500 VAC", Working Voltage="250 VAC", ComponentLink1Description=Manufacturer, ComponentLink1URL=http://www.we-online.de, ComponentLink2Description=Datasheet, ComponentLink2URL=https://katalog.we-online.de/em/datasheet/6130xx21121.pdf, Gender=Male, Mounting Technology=THT, Orientation=Vertical, Packaging=Bag, Part Number=61301021121, Pin Number=10, Pitch="2.54 mm", Publisher="Wurth Elektronik", Row Number=Dual
J6: "THT Vertical Pin Header WR-PHD, Pitch 2.54 mm, Single Row, 8 pins", Contact Resistance="20 mOhm", Operating Temperature="-40 to 105 degC", Rated Current="3 A", Withstanding Voltage="500 VAC", Working Voltage="250 VAC", ComponentLink1Description=Manufacturer, ComponentLink1URL=http://www.we-online.de, ComponentLink2Description=Datasheet, ComponentLink2URL=https://katalog.we-online.de/em/datasheet/6130xx11121.pdf, Gender=Male, Mounting Technology=THT, Orientation=Vertical, Packaging=Bag, Part Number=61300811121, Pin Number=8, Pitch="2.54 mm", Published Date="August 2018", Publisher="Wurth Elektronik", Row Number=Single
Q1 Q2 Q3 Q4 Q5 Q6 Q7 Q8 Q9 Q10 Q11 Q12: "P-Channel OptiMOS P3 Small-Signal-Transistor, -30 V VDS, -2 A ID, -55 to 150 degC, PG-SOT23, Reel, Green", Manufacturer=Infineon, ComponentLink1Description="Manufacturer URL", ComponentLink1URL=http://www.infineon.com/, ComponentLink2Description=Datasheet, ComponentLink2URL=http://www.infineon.com/dgdl/BSS308PE_Rev23_.pdf?folderId=db3a304314dca38901154a72e3951a65&fileId=db3a304330f686060131099c80400073, ComponentLink3Description="Package Specification", ComponentLink3URL=http://www.infineon.com/dgdl/SOT23-Package_Overview.pdf?folderId=db3a30431936bc4b0119532290053c66&fileId=db3a30431936bc4b0119533468123c85, Green=TRUE, Halogen-free=TRUE, ID (max)="-2 A", IDpuls (max)="-8 A", Mounting Technology="Surface Mount", PackageDescription="3-Pin Small Outline Transistor Package, 2.9 x 1.3 mm Body, 0.95 mm Pitch", PackageReference=PG-SOT23, PartNumber=BSS308PE, Pto t (max)="0.5 W", QG="-5 nC", RDS (on) (max)="80 mOhm", RDS (on) (max) (@4.5V)="130 mOhm", Rth="250 K/W", VDS (max)="-30 V", VGS(th) (max)="-1 V", VGS(th) (min)="-2 V"
R1 R63 R64 R65 R66 R67 R68 R69 R70: library part CR0805-JW-103ELF, "Chip Resistor 0805", Manufacturer=Bourns, ComponentLink1Description=Datasheet, ComponentLink1URL=https://www.bourns.com/docs/product-datasheets/chpreztr.pdf?sfvrsn=566c91f1_11
R2 R44 R45 R46 R47 R48 R49 R50 R51 R52 R53 R54 R55 R56: library part CR0805-FX-1000ELF, "Chip Resistor 0805", Manufacturer=Bourns, ComponentLink1Description=Datasheet, ComponentLink1URL=https://www.bourns.com/docs/product-datasheets/chpreztr.pdf?sfvrsn=566c91f1_11
R3 R4 R6 R8 R9 R10 R11 R12 R13 R14 R15 R16 R17 R18 R19 R61 R62: library part CR0805-FX-4700GLF, "Chip Resistor 0805", Manufacturer=Bourns, ComponentLink1Description=Datasheet, ComponentLink1URL=https://www.bourns.com/docs/product-datasheets/chpreztr.pdf?sfvrsn=566c91f1_11
R5 R7: library part ERA6AEB60R4V, "Chip Resistor 0805", Manufacturer=Panasonic, ComponentLink1Description=Datasheet, ComponentLink1URL=https://www.bourns.com/docs/product-datasheets/chpreztr.pdf?sfvrsn=566c91f1_11
R20 R21 R22 R23 R24 R25 R26 R27 R28 R29 R30 R31: library part 352115RFT, "SMD Power Resistor, Type 3521 Series", Manufacturer="TE Connectivity", Power Rating=2W, ComponentLink1Description=Datasheet, ComponentLink1URL=https://www.te.com/commerce/DocumentDelivery/DDEController?Action=showdoc&DocId=Data+Sheet%7F9-1773463-5%7FD%7Fpdf%7FEnglish%7FENG_DS_9-1773463-5_D.pdf%7F2176070-5
R32 R33 R34 R35 R36 R37 R38 R39 R40 R41 R42 R43: library part CR0805-JW-102ELF, "Chip Resistor 0805", Manufacturer=Bourns, ComponentLink1Description=Datasheet, ComponentLink1URL=https://www.bourns.com/docs/product-datasheets/chpreztr.pdf?sfvrsn=566c91f1_11
R57 R58 R59 R60 R71 R72: library part CR0805-FX-4701GLF, "Chip Resistor 0805", Manufacturer=Bourns, ComponentLink1Description=Datasheet, ComponentLink1URL=https://www.bourns.com/docs/product-datasheets/chpreztr.pdf?sfvrsn=566c91f1_11
RT1 RT2: library part NXRT15XV103FA1B040, "NTC Thermistor Leaded type NXRT Series", Manufacturer=Murata, ComponentLink1Description=Datasheet, ComponentLink1URL=https://www.murata.com/en-global/products/productdata/8796838297630/S0423E.pdf?1482204603000, ComponentLink2Description=Catalog, ComponentLink2URL=https://www.murata.com/~/media/webrenewal/support/library/catalog/products/thermistor/ntc/r44e.ashx?la=en, Reference=NXRT15XV103FA1B040
U1: "16-bit Microcontroller / (up to 128 KB Flash and 8K SRAM) with Advanced Analog", Manufacturer=Microchip, ComponentLink1Description=Datasheet, ComponentLink1URL=http://ww1.microchip.com/downloads/en/devicedoc/70293g.pdf, Pins=28
U2: "Galvanically isolated CAN / transceiver", Manufacturer="Texas Instruments", ComponentLink1Description=Datasheet, ComponentLink1URL=http://www.ti.com/lit/ds/symlink/iso1050.pdf, Pins=16
U3: "Multicell Battery Monitors", Manufacturer="Analog Devices", ComponentLink1Description=Datasheet, ComponentLink1URL=https://www.analog.com/media/en/technical-documentation/data-sheets/68111fb.pdf, Datasheet=https://www.analog.com/media/en/technical-documentation/data-sheets/68111fb.pdf, Pins=48
U4: library part R-78HB5.0-0.5, "High efficiency, high input voltage switching regulator.", ComponentLink1Description="Datasheet R-78HB5.0-0.5", ComponentLink1URL=https://www.recom-power.com/pdf/Innoline/R-78HBxx-0.5_L.pdf, ComponentLink2Description="Datasheet 173010542", ComponentLink2URL=https://katalog.we-online.de/pm/datasheet/173010542.pdf
U5: library part LM1117IMP-3.3/NOPB, "800-mA Low-Dropout Linear Regulator", Input Voltage="1.5-13.8 V", Manufacturer="Texas Instruments", Output Current="800 mA", Output Voltage="3.3 V", ComponentLink1Description=Datasheet, ComponentLink1URL=http://www.ti.com/lit/ds/symlink/lm1117.pdf, Reference=LM1117-3.3
U6: "ADC. Single Chip 12-Bit Data Acquisition System.", Manufacturer=Linear, SupplyCurrent="6 mA", SupplyVoltage="+/- 5V", ComponentLink1Description=Datasheet, ComponentLink1URL=https://www.analog.com/media/en/technical-documentation/data-sheets/129346fs.pdf, NumberOfChannels=8, Pins=20, Resolution="12 bits"
XTAL1: library part 830028710, "Industry standard SMD crystal WE-XTAL Quartz Crystal", Manufacturer="Wurth Elektronik", ComponentLink1Description=Datasheet, ComponentLink1URL=https://katalog.we-online.com/pbs/datasheet/830028710.pdf, Frequency=20MHz, Model=HC49/4HSMX, Mounting Technology=SMT

## Free pads (board coordinates)
  round 6 hole 3.25: ""(-3.576,28.094) ""(64.386,1.323) ""(64.386,52.834)

## Via types
v1: diameter 0.7, hole 0.5, Top Layer to Bottom Layer, 201 vias
v2: diameter 0.8, hole 0.5, Top Layer to Bottom Layer, 76 vias
v3: diameter 0.6, hole 0.5, Top Layer to Bottom Layer, 1 vias

## Nets (pads, with @x,y where several pads share a name; then routed paths per layer and width w, separated by ;. In a path a pad name is that pad's centre, name@x,y a point inside that pad or via, vN(x,y) a via of type N, cw(c..) or ccw(c..) an arc to the next point about the centre after c; other vN are vias at no path point)
+3.3: C4.1 C5.1 C6.2 C7.2 C8.2 C9.2 C47.2 J1.1 J2.2 R1.2 R62.2 R63.2 R64.2 R65.2 R66.2 R67.2 R68.2 R69.2 R70.2 U1.13 U1.28 U2.1 U5.3 | length 158.8
  Top Layer w0.25: U2.1@15.5,46.005 15.555,45.95 C7.2@17.875,45.95 C9.2@19.775,45.95 20.038,46.213 20.247,46.213 v1(21.557,47.523) 21.557,50.947 C8.2@23.383,52.774 ; R1.2@21.7,41.6 21.702,41.598 v1(22.377,41.598) 24.557,43.778 v1(35.436,43.778) 38.997,43.778 v1(40.05,42.725) ; C8.2@23.383,53.009 C8.2@23.383,52.774 ; U1.28@23.72,48.925 23.569,49.076 23.569,50.674 23.383,50.859 C6.2@23.383,51.059 C8.2@23.383,52.774 ; v1(38.979,40.771) 38.979,39.544 U1.13@38.96,39.525 38.975,39.51 C5.1@38.975,37.325 C4.1@38.975,35.4 38.961,35.386 38.961,34.277 39.776,33.461 43.664,33.461 44.51,32.615 44.51,30.609 46.39,28.729 v1(48.124,28.729) ; U5.3@58.4,18.65 58.4,18.296 59.35,17.346 59.704,17.346 63.299,13.751 65.691,13.751 66.756,14.817 66.756,15.944 v1(65.075,17.625) 65.075,18.65 U5.3@64.2,18.65 63.85,19 63.175,19 61.75,20.425 61.75,22.074 60.472,23.352 C47.2@60.272,23.352 ; C47.2@60.401,23.423 61.359,24.38 61.359,25.659 63.475,27.775 v1(63.9,27.775)
  Bottom Layer w0.25: v1(21.557,47.523) 22.377,46.702 v1(22.377,41.598) 22.377,35.955 24.069,34.264 29.719,34.264 J1.1@31.58,36.125 ; v1(35.436,43.778) 36.928,43.778 44.665,51.515 J2.2@44.665,52.95 ; v1(38.979,40.771) 38.979,41.654 v1(40.05,42.725) ; v1(48.124,28.729) 49.566,27.287 63.412,27.287 v1(63.9,27.775) 63.9,29.55 R63.2@63.85,29.6 R64.2@63.85,31.586 R65.2@63.85,33.596 R66.2@63.85,35.6 ; R62.2@62.774,17.681 62.83,17.625 v1(65.075,17.625) ; R70.2@63.837,43.625 63.837,41.627 R69.2@63.85,41.614 63.85,39.606 R68.2@63.856,39.6 63.856,37.606 R67.2@63.85,37.6 R66.2@63.85,35.6
+5: C42.2 C46.2 C56.2 C57.2 D16.2 F1.2 R57.2 R58.2 R59.2 R60.2 R61.2 R71.2 R72.2 U3.37 U3.39 U5.1 U6.14 U6.20 | length 121.7
  Top Layer w0.25: C42.2@12.625,30.95 12.62,30.955 v1(12.62,33.013) ; 18.873,30.8 14.833,30.8 v1(12.62,33.013) ; R57.2@20.642,37.25 R58.2@18.572,37.25 R59.2@16.502,37.25 R60.2@14.432,37.25 13.863,37.25 12.62,36.008 v1(12.62,33.013) ; v1(45.875,30.593) 45.875,31.65 R71.2@47.834,31.65 47.984,31.8 49.765,31.8 U6.20@49.925,31.96 ; v1(45.875,40.327) 45.875,41.05 C57.2@45.925,41.1 C56.2@47.872,41.1 48.072,41.1 49.417,39.755 49.75,39.755 U6.14@49.925,39.58 ; v1(57.907,22.446) 57.907,23.027 58.232,23.352 C46.2@58.27,23.352 58.47,23.352 60.7,21.122 60.7,19.625 63.871,16.454 64.096,16.454 U5.1@64.2,16.35 64.554,16.35 64.377,16.173 65.652,14.898 65.852,14.898 v1(65.9,14.85) v1@65.841,14.85
  Top Layer w0.254: 18.873,30.8 19.247,31.174 U3.39@19.247,32.488 19.247,33.272 19.45,33.475 20.041,33.475 20.247,33.269 U3.37@20.247,32.488
  Bottom Layer w0.25: v1(12.62,33.013) 15.04,30.593 v1(45.875,30.593) v1(45.875,40.327) ; v1@45.875,30.588 45.875,28.573 52.002,22.446 v1(57.907,22.446) ; R61.2@60.653,17.697 60.741,17.697 60.741,17.413 63.88,14.274 63.7,14.094 D16.2@63.906,14.094 ; F1.2@63.181,10.321 63.181,13.369 D16.2@63.906,14.094 ; v1(65.9,14.85) 65.75,14.7 64.925,14.7 64.544,14.319 64.215,14.319 D16.2@63.99,14.094 D16.2@63.906,14.094
GND: C1.1 C2.2 C3.2 C4.2 C5.2 C6.1 C7.1 C8.1 C9.1 C10.1 C13.1 C14.1 C15.1 C16.1 C17.1 C18.1 C19.1 C20.1 C21.1 C22.1 C23.1 C24.1 C25.1 C38.2 C39.2 C40.1 C41.1 C42.1 C43.1 C44.1 C45.1 C46.1 C47.1 C48.1 C49.1 C50.1 C51.1 C52.1 C53.1 C54.1 C55.1 C56.1 C57.1 D1.1 D2.1 D3.1 D16.1 D17.1 D18.1 FB15.2 J1.2 J2.3 J6.5 RT1.1 RT2.1 U1.3 U1.7 U1.8 U1.17 U1.18 U1.19 U1.27 U2.2 U2.7 U2.8 U3.30 U3.31 U3.36 U3.40 U3.45 U3.46 U3.47 U3.48 U4.2 U5.2 U6.9 U6.10 U6.11 U6.12 U6.13 | length 1.9
  Top Layer w0.25: C38.2@-5.446,17.168 C38.2@-5.246,17.168 C39.2@-5.246,15.493
  other v1: 53.197,4.07 54.394,4.07 55.59,4.07 56.787,4.07 57.984,4.07 -2.25,15.78 2.6,15.78 7.375,15.78 12.2,15.768 17.028,15.78 21.857,15.775 26.69,15.78 36.4,15.78 31.515,15.8 41.2,15.8 46.1,15.8 50.9,15.8 -5.231,18.114 26.896,19.769 31.225,20.851 21.644,21.01 57.8,21.1 9.781,21.296 18.378,21.296 0.481,21.464 5.379,21.475 35.089,21.495 39.471,21.495 40.156,21.495 42.566,21.495 43.251,21.495 49.645,21.495 50.568,21.495 45.225,21.525 60.427,22.4 52.55,24.773 54.059,24.773 2.374,27.144 3.571,27.144 4.768,27.144 5.965,27.144 7.161,27.144 50.744,29.073 51.975,29.073 53.205,29.073 54.436,29.073 55.666,29.073 56.897,29.073 58.127,29.073 66.941,29.531 66.941,31.55 14.139,33.456 66.941,33.57 13.606,33.941 43.374,34.744 66.941,35.59 66.941,37.609 47.741,39.597 66.941,39.629 15.541,41.523 16.695,41.523 66.941,41.648 15.541,42.724 16.695,42.724 66.941,43.668 20.973,43.78 19.603,49.584 20.296,49.584 55.302,49.605 56.399,49.605 57.497,49.605 58.594,49.605 59.692,49.605 55.302,50.708 56.399,50.708 57.497,50.708 58.594,50.708 59.692,50.708 35.274,54.268 36.426,54.268 37.578,54.268 38.73,54.268 18.084,54.986 19.236,54.986
  other v2: -5.266,0.068 -2.766,0.068 32.234,0.068 54.734,0.068 57.234,0.068 59.734,0.068 -1.516,2.568 15.984,2.568 25.984,2.568 45.984,2.568 53.484,2.568 55.984,2.568 -2.766,5.068 27.234,5.068 29.734,5.068 32.234,5.068 39.734,5.068 42.234,5.068 52.234,5.068 54.734,5.068 57.234,5.068 62.234,5.068 64.734,5.068 65.984,7.568 64.734,10.068 58.484,12.568 60.984,12.568 65.984,12.568 -4.016,22.568 38.484,22.568 48.484,22.568 0.984,27.568 8.484,27.568 20.984,27.568 23.484,27.568 28.484,27.568 33.484,27.568 35.984,27.568 38.484,27.568 65.984,27.568 -0.266,30.068 7.234,30.068 9.734,30.068 47.234,30.068 49.734,30.068 52.234,30.068 54.734,30.068 57.234,30.068 8.484,32.568 10.984,32.568 53.484,32.568 55.984,32.568 65.984,32.568 37.234,35.068 52.234,35.068 54.734,35.068 57.234,35.068 53.484,37.568 65.984,37.568 17.234,40.068 52.234,40.068 18.484,42.568 25.984,42.568 53.484,42.568 55.984,42.568 65.984,42.568 42.234,45.068 44.734,45.068 47.234,45.068 64.734,45.068 65.984,47.568 17.234,50.068 52.234,50.068 35.984,52.568 38.484,52.568 58.484,52.568
  other v3: 14.575,20.475
NetC1_2: C1.2 J2.1 R1.1 R2.1 | length 32.3
  Top Layer w0.25: R2.1@19.8,39.525 R1.1@19.8,41.6 C1.2@19.8,43.775 19.8,43.975 20.695,44.87 v1(35.436,44.87)
  Bottom Layer w0.25: v1(35.436,44.87) 37.07,44.87 42.125,49.925 J2.1@42.125,52.95
NetC2_1: C2.1 U1.9 XTAL1.2 | length 14.2
  Top Layer w0.25: C2.1@31.534,27.425 31.525,27.434 XTAL1.2@31.525,31.5 33.375,31.5 33.88,32.005 U1.9@33.88,39.525
NetC3_1: C3.1 U1.10 XTAL1.1 | length 15.9
  Top Layer w0.25: U1.10@35.15,39.525 34.975,39.35 35.325,39.35 35.325,35.46 39.285,31.5 XTAL1.1@41.025,31.5 41.025,27.453 C3.1@41.053,27.425
NetC10_2: C10.2 U1.20 | length 2.3
  Top Layer w0.25: U1.20@33.88,48.925 34.025,49.07 34.025,50.65 34.225,50.85 C10.2@34.225,51.05
NetC11_1: C11.1 C12.1 J3.4 U2.9 U2.10 U2.15 | length 13.9
  Top Layer w0.25: 1.425,53.625 U2.10@5.72,53.625 ; 1.455,54.895 U2.9@5.75,54.895 ; 1.466,47.275 U2.15@5.761,47.275
  Bottom Layer w0.25: C12.1@-4.2,54.65 C12.1@-4.2,54.45 -4.2,54.25 -3.875,53.925 C12.1@-3.846,53.925 ; C11.1@-2.325,46.625 C11.1@-2.2,46.75
  other v1: -1.144,47.057 -6.126,53.444 0.074,55.444
NetC11_2: C11.2 J3.1 U2.16 | length 18.9
  Top Layer w0.25: v1(-3.275,45.675) -0.2,45.675 0.15,46.025 5.73,46.025 U2.16@5.75,46.005
  Bottom Layer w0.25: J3.1@-5.2,51.975 -6.7,50.475 -6.7,47.975 -5.775,47.05 -4.55,47.05 C11.2@-4.225,46.725 ; C11.2@-3.9,47.15 -4.225,46.825 C11.2@-4.225,46.725 ; v1(-3.275,45.675) -4.025,46.425 -4.225,46.425 C11.2@-4.225,46.625 C11.2@-4.225,46.725
NetC12_2: C12.2 R5.1 R7.1 | length 5.7
  Bottom Layer w0.25: C12.2@-2.3,54.45 -2.3,54.025 R7.1@0.125,51.6 R5.1@0.125,49.775
NetC13_2: C13.2 C27.2 R44.2 U3.2 | length 27.1
  Top Layer w0.25: v1(-3.941,19.318) -3.466,19.318 C13.2@-3.141,18.993 1.696,23.83 14.741,23.83 15.247,24.335 U3.2@15.247,25.638
  Bottom Layer w0.25: R44.2@-3.316,18.468 -3.499,18.651 -3.499,18.876 v1(-3.941,19.318) -3.291,19.968 C27.2@-1.041,19.968
NetC14_2: C14.2 C27.1 C28.2 R45.2 U3.4 | length 24.3
  Top Layer w0.25: v1(0.825,19) 1.653,19 1.665,19.012 C14.2@1.684,18.993 5.621,22.93 15.19,22.93 16.247,23.987 U3.4@16.247,25.638
  Bottom Layer w0.25: R45.2@1.509,18.468 1.284,18.693 0.928,18.693 0.825,18.796 v1(0.825,19) 0.825,19.502 0.609,19.718 C27.1@0.859,19.968 C28.2@3.809,19.968